# EAGLE board v 0.2 (EAGLE 7.5.2)

Size 100 x 80 mm. Coordinates in mm from the lower left corner, seen from the top.
Outline: 0,0 100,0 100,80 0,80 0,0
Copper layers (1*16): Top 0.035mm / dielectric 1.5mm / Bottom 0.035mm
Design rules "default": minimum track width 10mil, minimum drill 24mil, track to track 8mil, track to pad 8mil, pad to pad 8mil, via to via 8mil, smd to smd 8mil, copper to edge 40mil, drill to drill 8mil, minimum pad ring 10mil, minimum via ring 8mil, stop-mask expansion 4mil, vias tented up to drill 0mil, thermal gap 10mil

## Footprints (pad centres in the part's own frame; a part is rotated, then mirrored left to right if it is on the bottom)
1X08 = drill 1.016 long: 1 -8.89,0; 2 -6.35,0; 3 -3.81,0; 4 -1.27,0; 5 1.27,0; 6 3.81,0; 7 6.35,0; 8 8.89,0
W237-136 = drill 1.194 long: 1 -12.5,-1.27; 2 -7.5,-1.27; 3 -2.5,-1.27; 4 2.5,-1.27; 5 7.5,-1.27; 6 12.5,-1.27

## Placement (x,y rotation side)
JP1  [1X08]  73.66,64.77 0 top
JP2  [1X08]  11.43,-10.16 0 top  (outside the outline)
JP3  [1X08]  11.43,-16.51 0 top  (outside the outline)
X1  [W237-136]  25.4,21.59 0 top
X2  [W237-136]  15.24,-35.56 0 top  (outside the outline)
X3  [W237-136]  72.39,27.94 0 top
X4  [W237-136]  15.24,-60.96 0 top  (outside the outline)

## Library data of the parts
JP1-JP3 = pinhead
X1-X4 = con-wago-500; MPN: 237-136; OC_FARNELL: unknown; OC_NEWARK: 84K9151

## Nets
N$1: JP1.1 X1.1
N$2: JP1.8 X3.2

## Tracks (layer width: path | path; a pad name or v marks a point on that pad's centre or on a via)
N$1  (1 unrouted)
N$2  (1 unrouted)